# Altium PCB TK531_Utgangstrinn.PcbDoc
Units mm, origin at the board's own origin, x right, y up, seen from the top; angles counter-clockwise.
Board outline 39.37 x 69.85 mm, 2 copper layers (Top Layer, Bottom Layer); 13 components, 9 nets, 30 pads, 0 vias.
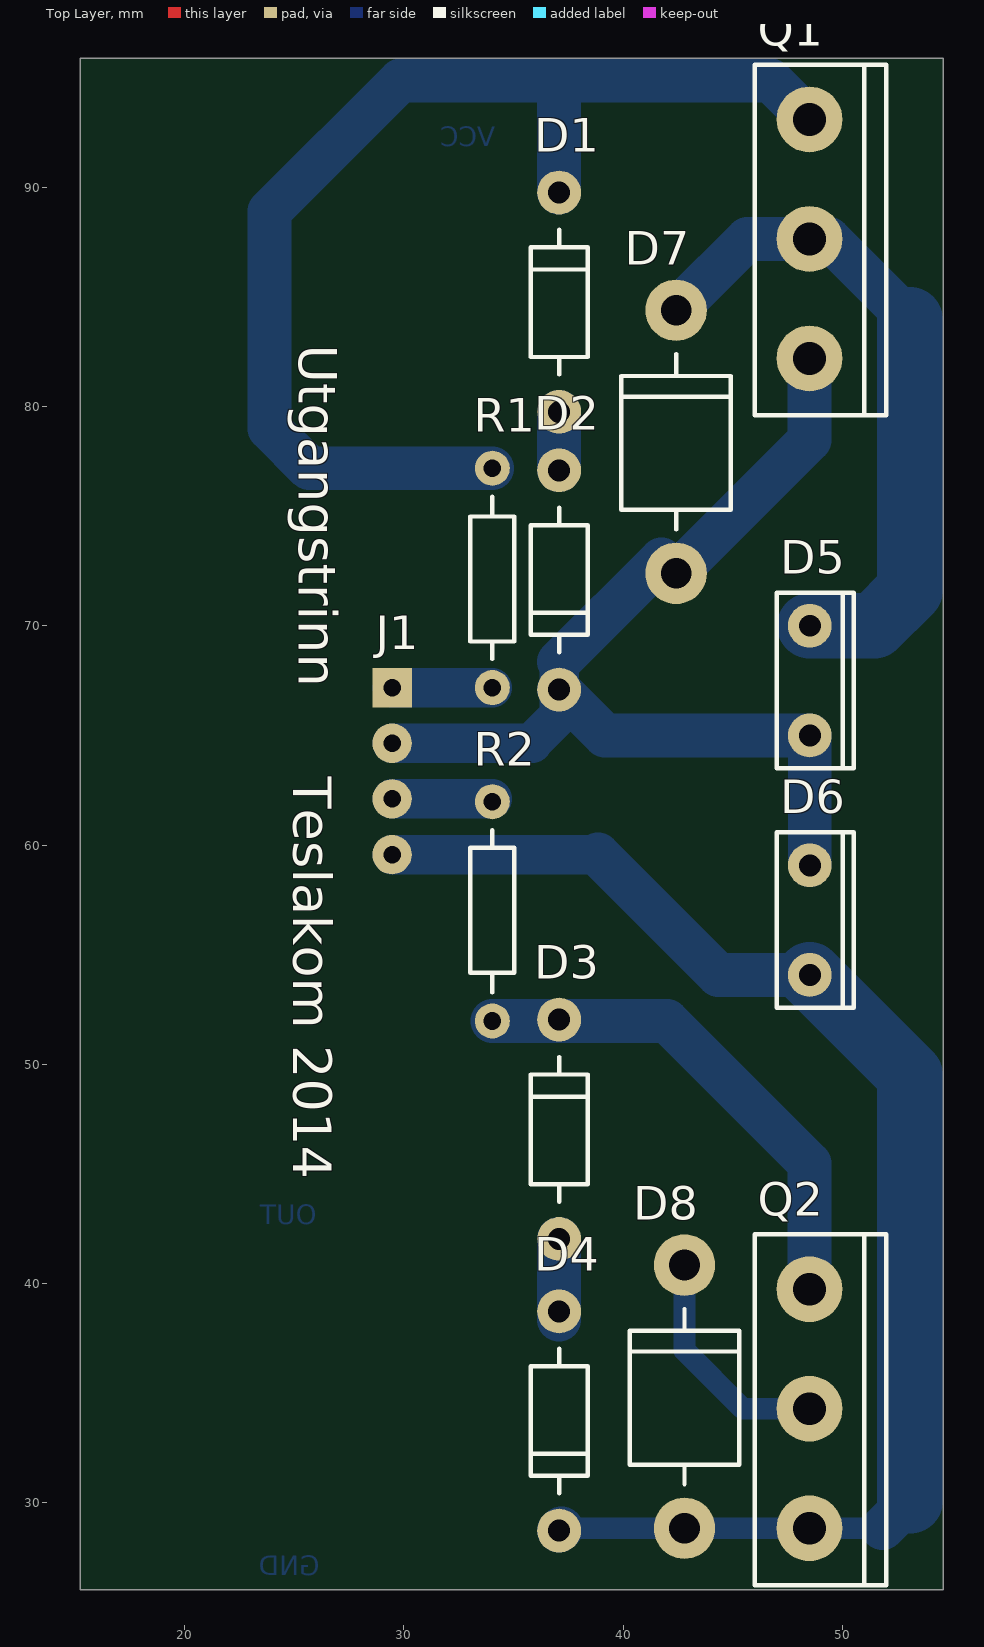
[diagram p0: Top Layer view]
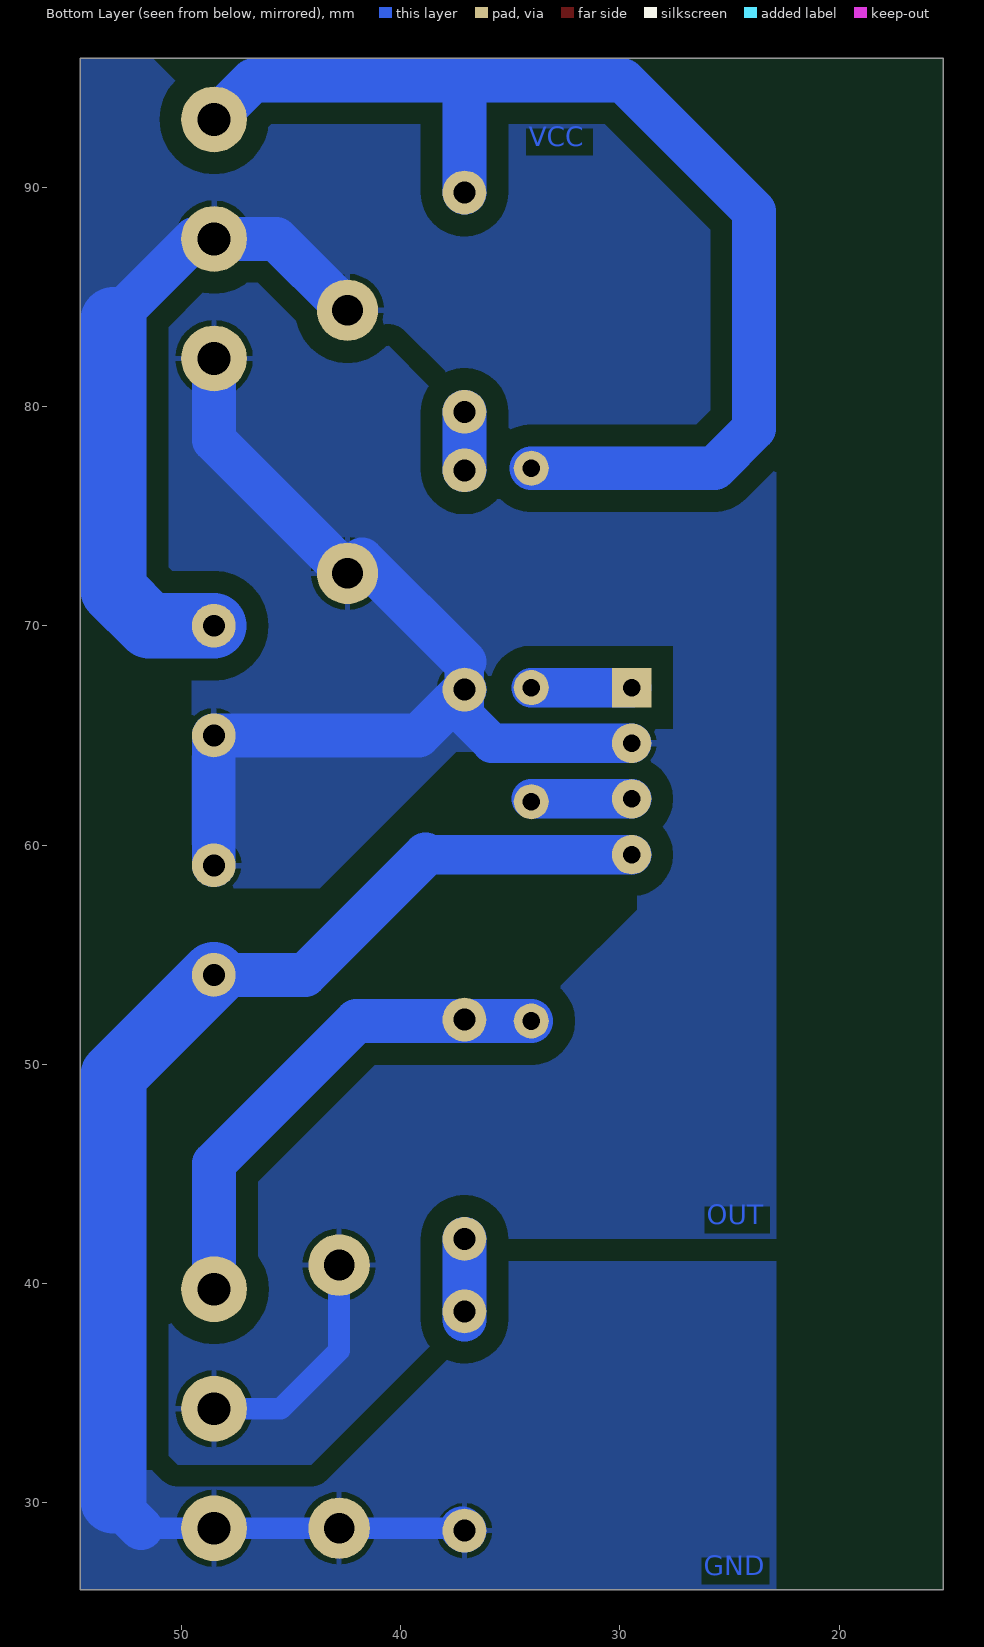
[diagram p1: Bottom Layer view, seen from below]

## Layer stack, top to bottom
Top Solder: solder mask 0.0102, Solder Resist, Dk 3.5
Top Layer: signal copper 0.0356
Dielectric1: dielectric 0.32, FR-4, Dk 4.8
Bottom Layer: signal copper 0.0356
Bottom Solder: solder mask 0.0102, Solder Resist, Dk 3.5

## Board outline
54.61,26.035 54.61,95.885 15.24,95.885 15.24,26.035

## Design rules (kind name [scope] priority, off if disabled: settings)
Clearance Clearance_1 [IsText] p1: gap=0
Clearance [All] p2: gap=1
PolygonConnect [All] p1: connectstyle=Relief reliefconductorwidth=0.254 reliefentries=4 polygonreliefangle="90 Angle" airgapwidth=0.254
RoutingVias [All] p1: holewidth=0.711 width=1.27 viastyle="Through Hole" minholewidth=0.711 minwidth=1.27 maxholewidth=0.711 maxwidth=1.27
SolderMaskExpansion [All] p1: expansion=0.102
UnpouredPolygon [All] p1: allowunpoured=FALSE
Width [All] p1: maxlimit=10 minlimit=0.4 preferedwidth=1
29 further rules are at their usual default settings.

## Classes and differential pairs
component class Utgangstrinn: D1 D2 D3 D4 D7 D8 J1 Q1 Q2 R1 R2

## Components (designator, comment, footprint, x,y, rotation, side; value= is the part's Value field where it differs from the comment)
D1 "1N4744A" DO-41 37.084,79.756 r90 top
D2 "1N4744A" DO-41 37.084,77.089 r270 top
D3 "1N4744A" DO-41 37.084,42.037 r90 top
D4 "1N4744A" DO-41 37.084,38.735 r270 top
D5 "15ETX06" TO-220 48.514,70 r270 top
D6 "15ETX06" TO-220 48.514,59.077 r270 top
D7 "1.5KE400A" DO-201 42.418,72.39 r90 top
D8 "1.5KE400A" DO-201 42.799,28.846 r90 top
J1 "JST 4pin" "JST 4pin" 29.464,67.183 r180 top
Q1 "G4PC50W" TO-247 48.5,93.091 r270 top
Q2 "G4PC50W" TO-247 48.5,39.746 r270 top
R1 "10R" "Axial 1/4W" 34.036,67.183 r90 top
R2 "10R" "Axial 1/4W" 34.036,61.976 r270 top

## Footprints (in the part's own frame and the unit in brackets; to place one, negate y for a bottom-side part, rotate by r counter-clockwise, add the part's x,y. Pads: shape width x height; smd on the part's side, far side on the other; paste and mask are expansions set on the pad)
"Axial 1/4W" [mm]
  round 1.6 hole 0.8: 1(0,0) 2(10,0)
  silkscreen extent 1.3,-1 8.7,1
DO-41 [mm]
  round 2 hole 1: A(0,0) K(10,0)
  silkscreen extent 1.7,-1.3 8.3,1.3
DO-201 [mm]
  round 2.8 hole 1.4: A(0,0) K(12,0)
  silkscreen extent 2,-2.5 10,2.5
"JST 4pin" [mm]
  rect 1.8x1.8 hole 0.8: 1(0,0)
  round 1.8 hole 0.8: 2(0,2.54) 3(0,5.08) 4(0,7.62)
TO-220 [mm]
  round 2 hole 1: 1(0,0) 3(5,0)
  silkscreen extent -1.5,-1.5 6.5,2
TO-247 [mm]
  round 3 hole 1.5: C(5.45,0) E(10.9,0) G(0,0)
  silkscreen extent -2.5,-2.5 13.5,3.5

## Part data
R1 R2: library part R

## Nets (pads, with @x,y where several pads share a name; then routed paths per layer and width w, separated by ;. In a path a pad name is that pad's centre, name@x,y a point inside that pad or via, vN(x,y) a via of type N, cw(c..) or ccw(c..) an arc to the next point about the centre after c; other vN are vias at no path point)
GND: D4.K D6.3 D8.A J1.4 Q2.E | length 63.8
  Bottom Layer w1: D4.K@37.195,28.846 51.833,28.846
  Bottom Layer w1.8: J1.4 38.862,59.563
  Bottom Layer w2: D4.K D4.K@37.195,28.846 ; 38.862,59.563 44.348,54.077 D6.3 ; 51.833,28.846 53.086,30.099
  Bottom Layer w3: D6.3 53.086,49.505 53.086,30.099
NetD1_A: D1.A D2.A | length 2.7
  Bottom Layer w2: D2.A D1.A
NetD1_K: D1.K Q1.G R1.2 | length 53.8
  Bottom Layer w2: R1.2 25.687,77.183 23.876,78.994 23.876,88.9 29.845,94.869 46.736,94.869 Q1.G@48.514,93.091 ; D1.K 37.084,94.869
NetD3_A: D3.A D4.A | length 3.7
  Bottom Layer w2: D4.A@37.084,38.354 D3.A
NetD3_K: D3.K Q2.G R2.2 | length 22.9
  Bottom Layer w2: R2.2 42.004,51.976 48.5,45.48 Q2.G@48.5,39.765
NetJ1_1: J1.1 R1.1 | length 4.6
  Bottom Layer w1.8: J1.1 R1.1
NetJ1_3: J1.3 R2.1 | length 4.6
  Bottom Layer w1.8: J1.3 R2.1@34.036,62.103
OUT: D2.K D5.3 D6.1 D7.A D8.K J1.2 Q1.E Q2.C | length 59.1
  Bottom Layer w1: D8.K 42.799,36.957 45.46,34.296 Q2.C@49.149,34.296
  Bottom Layer w1.8: J1.2 35.847,64.643 ; 35.847,64.676 37.084,65.913 D2.K 37.084,68.359
  Bottom Layer w2: D2.K 39.173,65 D5.3 D6.1 ; 37.084,68.359 D7.A@41.75,73.025 ; D7.A 48.5,78.472 Q1.E
VCC: D5.1 D7.K Q1.C | length 30.8
  Bottom Layer w2: D7.K@42.672,84.644 45.669,87.641 49.392,87.641 53.086,83.947
  Bottom Layer w3: D5.1 51.458,70 53.086,71.628 53.086,83.947

## Polygon pours and split planes (outlines as drawn)
OUT on Bottom Layer "B" (solid, pour order 8): 49.149,39.746 50.424,39.746 52.07,38.1 52.07,33.655 50.165,31.75 45.72,31.75 44.069,31.75 37.084,38.735 37.084,42.037 22.86,42.037 22.86,68.58 29.21,68.58 29.21,58.42 29.21,57.056 34.29,51.976 42.004,51.976 49.149,44.831 49.149,39.746
GND on Bottom Layer "B" (solid, pour order 10): 54.61,26.035 22.86,26.035 22.86,42.037 37.084,42.037 37.084,38.735 44.069,31.75 44.323,31.496 54.61,31.496 54.61,26.035
VCC on Bottom Layer "B" (solid, pour order 12): 54.61,95.885 51.308,95.885 48.514,93.091 28.067,93.091 24.257,89.281 24.13,89.154 24.13,78.74 25.687,77.183 34.29,77.183 36.99,77.183 37.084,77.089 37.084,79.756 37.784,79.756 42.418,84.39 45.669,87.641 48.514,87.641 52.335,83.82 54.61,83.82 54.61,95.885
OUT on Bottom Layer "Bottom Layer-No Net" (solid, pour order 9): 22.86,77.343 22.86,66.294 37.465,66.294 35.941,64.77 35.941,64.262 37.465,64.262 43.688,58.039 49.53,58.039 49.53,69.596 52.578,72.644 52.705,72.771 52.705,84.201 51.827,84.201 48.387,87.641 47.995,87.249 44.577,87.249 44.577,86.803 42.291,84.517 34.957,77.183 34.036,77.183 22.893,77.183 22.86,77.216

## Other copper
Bottom Layer:
  text "VCC" at 34.163,91.567 h1.52
  text "OUT" at 26.035,42.418 h1.52
  text "GND" at 26.162,26.416 h1.52

## Silkscreen, mask and mechanical layers (free items; w line width, h text height)
Top Overlay:
  text "Utgangstrinn" at 24.638,82.804 h3 r270
  text "Teslakom 2014" at 24.384,63.119 h3 r270